# Altium PCB 数字时钟v3.PcbDoc
Units mil, origin at the board's own origin, x right, y up, seen from the top; angles counter-clockwise.
Board outline 3937.01 x 3785 mil, 2 copper layers (Top Layer, Bottom Layer); 76 components, 124 nets, 412 pads, 35 vias.
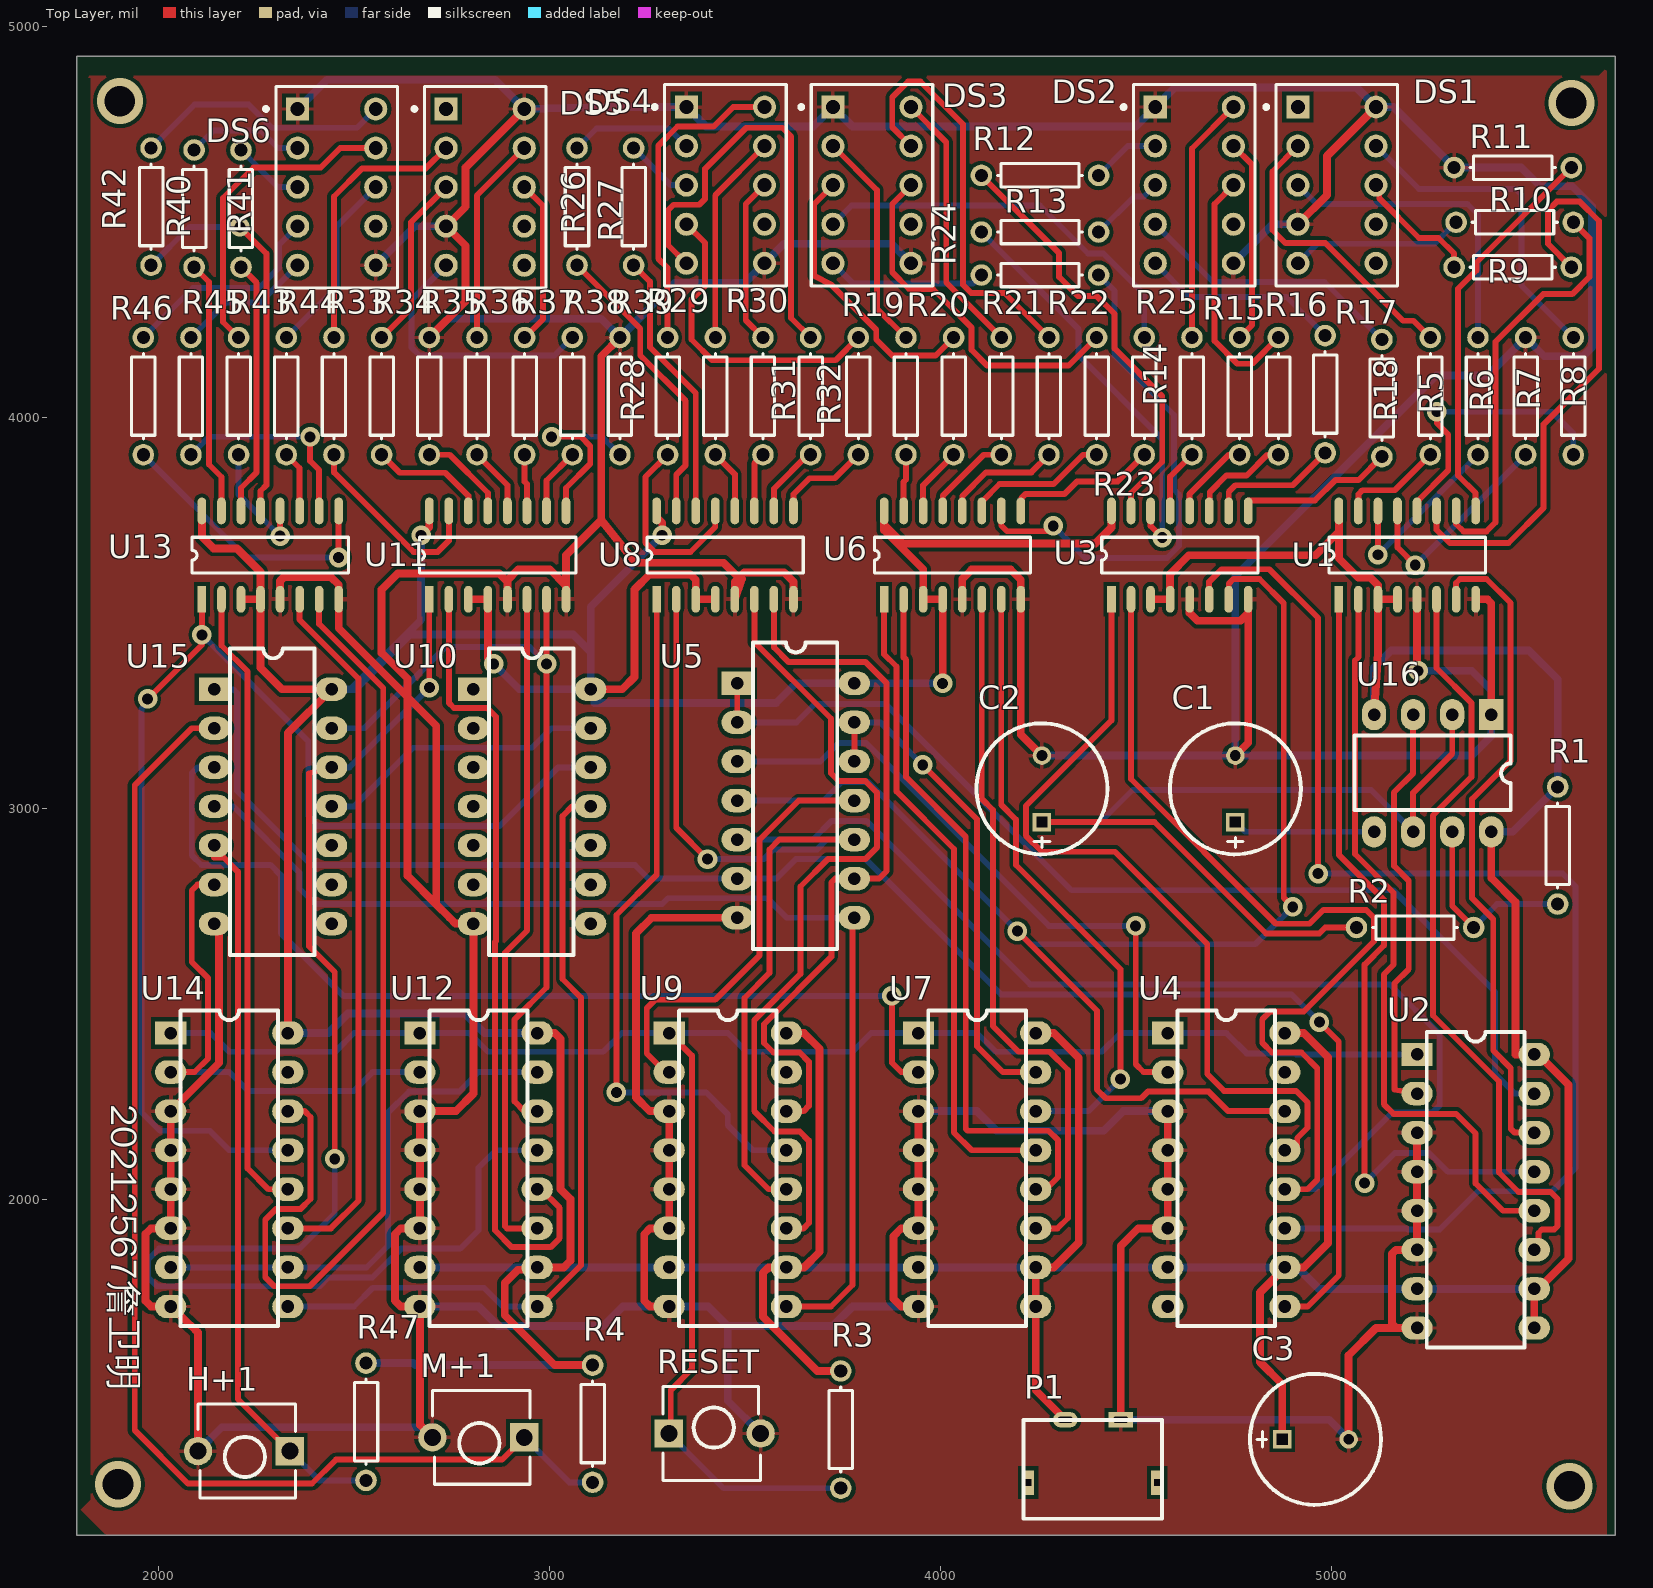
[diagram p0: Top Layer view]
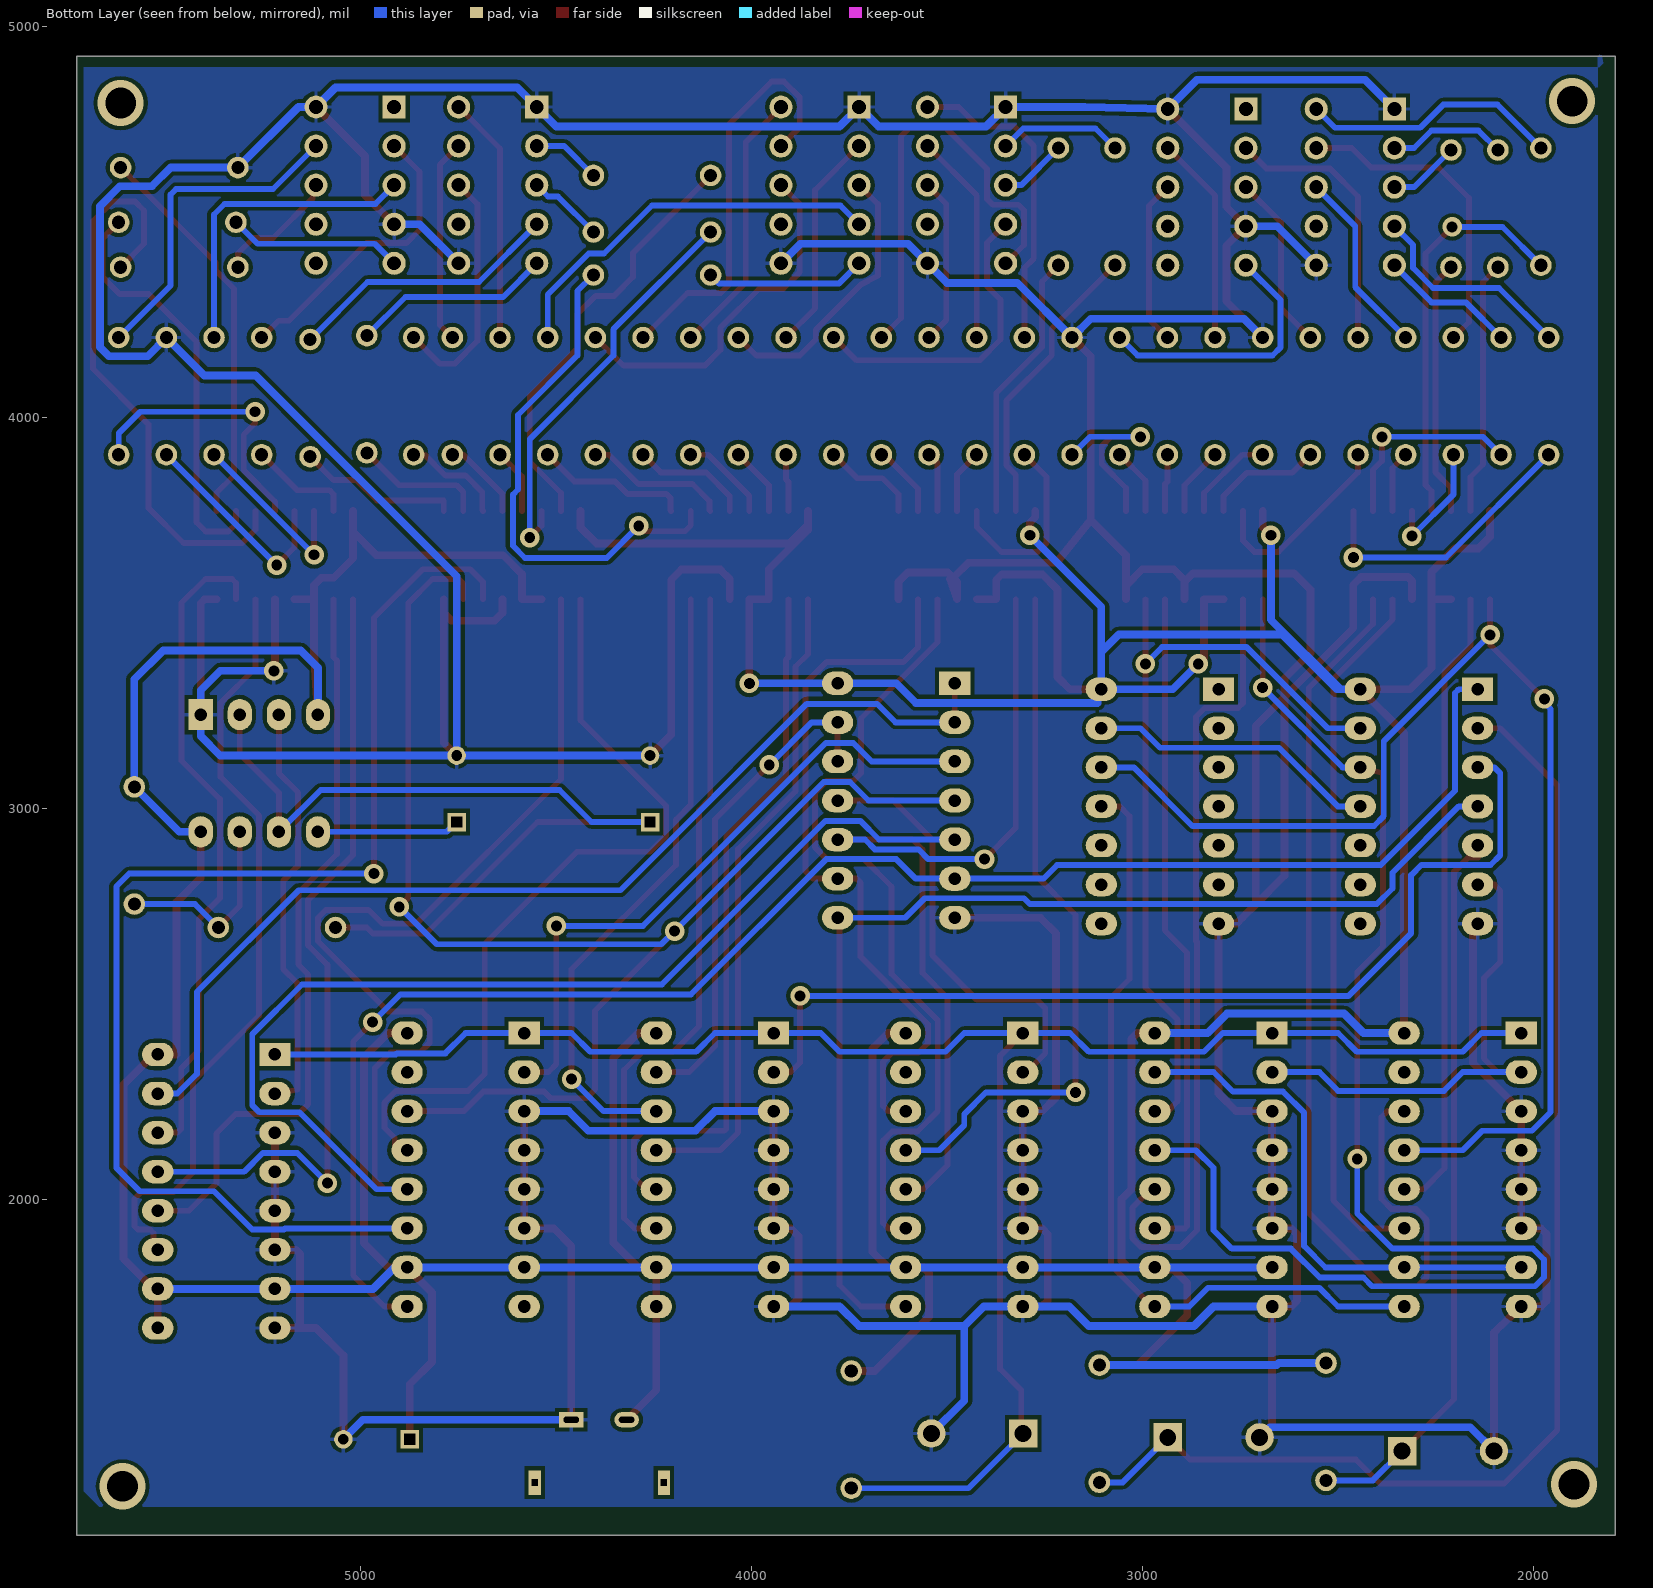
[diagram p1: Bottom Layer view, seen from below]

## Layer stack, top to bottom
Top Solder: solder mask 0.4, Solder Resist, Dk 3.5
Top Layer: signal copper 1.4
Dielectric 1: dielectric 12.6, FR-4, Dk 4.8
Bottom Layer: signal copper 1.4
Bottom Solder: solder mask 0.4, Solder Resist, Dk 3.5

## Board outline
1790,1140 1790,4925 5727.01,4925 5727.01,1140

## Design rules (kind name [scope] priority, off if disabled: settings)
Clearance [All] p1: gap=10 ignorepadtopadclearanceinfootprint=FALSE
PolygonConnect [All] p1: connectstyle=Relief reliefconductorwidth=10 reliefentries=4 polygonreliefangle="90 Angle" airgapwidth=10
RoutingVias [All] p1: holewidth=28 width=50 viastyle="Through Hole" minholewidth=28 minwidth=50 maxholewidth=28 maxwidth=50
SolderMaskExpansion [All] p1: expansion=4 istentingtop=FALSE
Width GND [InNet('GND')] p1: maxlimit=25 minlimit=10 preferedwidth=20
Width VCC [InNet('VCC')] p2: maxlimit=25 minlimit=10 preferedwidth=20
Width [All] p3: maxlimit=20 minlimit=10 preferedwidth=15
30 further rules are at their usual default settings.

## Components (designator, comment, footprint, x,y, rotation, side; value= is the part's Value field where it differs from the comment)
C1 "Cap Pol1" 电容 4755,2965 r270 top value=10uF
C2 "Cap Pol1" 电容 4260,2965 r270 top value=10uF
C3 "Cap Pol1" 电容 4875,1385 r180 top value=10uF
DS1 "Dpy Amber-CC" A 5015,4595 r0 top
DS2 "Dpy Amber-CC" A 4650,4595 r0 top
DS3 "Dpy Amber-CC" A 3825,4595 r0 top
DS4 "Dpy Amber-CC" A 3450,4595 r0 top
DS5 "Dpy Amber-CC" A 2835,4590 r0 top
DS6 "Dpy Amber-CC" A 2455,4590 r0 top
H+1 "SW-PB" 按键 2335,1355 r180 top
M+1 "SW-PB" 按键 2935,1390 r180 top
P1 "type-c-2p" type-c-2p 4461.73,1435 r180 top
R1 "Res3" AXIAL-0.3 5580,2905 r90 top value=47K
R2 "Res3" AXIAL-0.3 5215,2695 r0 top value=47K
R3 "Res3" AXIAL-0.3 3745,1410 r270 top value=220
R4 "Res3" AXIAL-0.3 3110,1425 r270 top value=220
R5 "Res1" AXIAL-0.3 5254,4055 r90 top value=1K
R6 "Res1" AXIAL-0.3 5376,4055 r90 top value=1K
R7 "Res1" AXIAL-0.3 5498,4055 r90 top value=1K
R8 "Res1" AXIAL-0.3 5620,4055 r90 top value=1K
R9 "Res1" AXIAL-0.3 5465,4385 r180 top value=1K
R10 "Res1" AXIAL-0.3 5470,4500 r180 top value=1K
R11 "Res1" AXIAL-0.3 5465,4640 r180 top value=1K
R12 "Res1" AXIAL-0.3 4255,4620 r0 top value=1K
R13 "Res1" AXIAL-0.3 4255,4475 r0 top value=1K
R14 "Res1" AXIAL-0.3 4644,4055 r90 top value=1K
R15 "Res1" AXIAL-0.3 4766,4055 r90 top value=1K
R16 "Res1" AXIAL-0.3 4865,4055 r90 top value=1K
R17 "Res1" AXIAL-0.3 4985,4060 r90 top value=1K
R18 "Res1" AXIAL-0.3 5130,4050 r90 top value=1K
R19 "Res1" AXIAL-0.3 3912,4055 r90 top value=1K
R20 "Res1" AXIAL-0.3 4034,4055 r90 top value=1K
R21 "Res1" AXIAL-0.3 4156,4055 r90 top value=1K
R22 "Res1" AXIAL-0.3 4278,4055 r90 top value=1K
R23 "Res1" AXIAL-0.3 4400,4055 r90 top value=1K
R24 "Res1" AXIAL-0.3 4255,4365 r180 top value=1K
R25 "Res1" AXIAL-0.3 4522,4055 r90 top value=1K
R26 "Res1" AXIAL-0.3 3070,4540 r90 top value=1K
R27 "Res1" AXIAL-0.3 3215,4540 r90 top value=1K
R28 "Res1" AXIAL-0.3 3302,4055 r90 top value=1K
R29 "Res1" AXIAL-0.3 3424,4055 r90 top value=1K
R30 "Res1" AXIAL-0.3 3546,4055 r90 top value=1K
R31 "Res1" AXIAL-0.3 3668,4055 r90 top value=1K
R32 "Res1" AXIAL-0.3 3790,4055 r90 top value=1K
R33 "Res1" AXIAL-0.3 2448,4055 r90 top value=1K
R34 "Res1" AXIAL-0.3 2570,4055 r90 top value=1K
R35 "Res1" AXIAL-0.3 2692,4055 r90 top value=1K
R36 "Res1" AXIAL-0.3 2814,4055 r90 top value=1K
R37 "Res1" AXIAL-0.3 2936,4055 r90 top value=1K
R38 "Res1" AXIAL-0.3 3058,4055 r90 top value=1K
R39 "Res1" AXIAL-0.3 3180,4055 r90 top value=1K
R40 "Res1" AXIAL-0.3 2090,4535 r90 top value=1K
R41 "Res1" AXIAL-0.3 2210,4535 r90 top value=1K
R42 "Res1" AXIAL-0.3 1980,4540 r90 top value=1K
R43 "Res1" AXIAL-0.3 2204,4055 r90 top value=1K
R44 "Res1" AXIAL-0.3 2326,4055 r90 top value=1K
R45 "Res1" AXIAL-0.3 2082,4055 r90 top value=1K
R46 "Res1" AXIAL-0.3 1960,4055 r90 top value=1K
R47 "Res3" AXIAL-0.3 2530,1430 r270 top value=220
RESET "SW-PB" 按键 3305,1400 r0 top
U1 "CD4511" CD4511BM/TR 5020,3535 r90 top
U2 "74LS160" DIP-16 5170,2370 r0 top
U3 "CD4511" CD4511BM/TR 4438,3535 r90 top
U4 "74LS160" DIP-16 4532,2425 r0 top
U5 "74LS00" DIP-14 3430,3320 r0 top
U6 "CD4511" CD4511BM/TR 3856,3535 r90 top
U7 "74LS160" DIP-16 3894,2425 r0 top
U8 "CD4511" CD4511BM/TR 3274,3535 r90 top
U9 "74LS160" DIP-16 3256,2425 r0 top
U10 "74LS00" DIP-14 2754.95,3305 r0 top
U11 "CD4511" CD4511BM/TR 2692,3535 r90 top
U12 "74LS160" DIP-16 2618,2425 r0 top
U13 "CD4511" CD4511BM/TR 2110,3535 r90 top
U14 "74LS160" DIP-16 1980,2425 r0 top
U15 "74LS08" DIP-14 2091.97,3305 r0 top
U16 "NE555" DIP-8 5410,3290 r270 top

## Footprints (in the part's own frame and the unit in brackets; to place one, negate y for a bottom-side part, rotate by r counter-clockwise, add the part's x,y. Pads: shape width x height; smd on the part's side, far side on the other; paste and mask are expansions set on the pad)
A [mm] "LED, 7-Segment Display, 7.62 mm, RHD; 10 Leads; Row Space 5.08 mm; Pitch 2.54 mm"
  rect 1.5x1.5 hole 0.9: 1(-2.54,5.08)
  round 1.5 hole 0.9: 2(-2.54,2.54) 3(-2.54,0) 4(-2.54,-2.54) 5(-2.54,-5.08) 6(2.54,-5.08) 7(2.54,-2.54) 8(2.54,0) 9(2.54,2.54) 10(2.54,5.08)
  silkscreen extent -4.72,-6.55 3.95,6.55, body extent -3.95,-6.55 3.95,6.55, height 6.34
AXIAL-0.3 [mm] "Axial Device, Thru-Hole; 2 Leads; 0.3 in Pin Spacing"
  round 1.4 hole 0.85: 1(-3.81,0) 2(3.81,0)
  silkscreen extent -2.77,-0.76 2.77,0.76
CD4511BM/TR [mm]
  rect 1.745x0.56 smd: 1(0,0)
  oval 1.745x0.56 smd: 2(0,-1.27) 3(0,-2.54) 4(0,-3.81) 5(0,-5.08) 6(0,-6.35) 7(0,-7.62) 8(0,-8.89) 9(5.745,-8.89) 10(5.745,-7.62) 11(5.745,-6.35) 12(5.745,-5.08) 13(5.745,-3.81) 14(5.745,-2.54) 15(5.745,-1.27) 16(5.745,0)
  silkscreen extent 1.71,-9.53 4.04,0.64
DIP-8 [mil]
  rect 80x62 / inner rect 100x50 / far side rect 80x62 hole 32: 1(50,0)
  oval 80x62 / inner oval 100x50 / far side oval 80x62 hole 32: 2(50,-100) 3(50,-200) 4(50,-300) 5(350,-300) 6(350,-200) 7(350,-100) 8(350,0)
  silkscreen extent 104,-350 294,50, body extent 37,-334 360,31, height 148
DIP-14 [mil]
  rect 80x60 hole 32: 1(50,0)
  oval 80x60 hole 32: 2(50,-100) 3(50,-200) 7(50,-600) 8(350,-600) 9(350,-500) 10(350,-400) 11(350,-300) 12(350,-200) 13(350,-100) 14(350,0)
  oval 80x60 / inner oval 100x50 / far side oval 80x62 hole 32: 4(50,-300) 5(50,-400) 6(50,-500)
  silkscreen extent 90,-680 306,104, body extent 50,-676 360,92, height 200
DIP-16 [mil] "淘宝ID:黄晶宝石   店铺网址:https://shop463601444.taobao.com"
  rect 80x60 / inner rect 100x50 / far side rect 80x60 hole 32: 1(50,0)
  oval 80x60 / inner oval 100x50 / far side oval 80x60 hole 32: 2(50,-100) 3(50,-200) 4(50,-300) 5(50,-400) 6(50,-500) 7(50,-600) 8(50,-700) 9(350,-700) 10(350,-600) 11(350,-500) 12(350,-400) 13(350,-300) 14(350,-200) 15(350,-100) 16(350,0)
  silkscreen extent 75,-750 325,58, body extent 42,-744 352,44, height 200
type-c-2p [mm]
  rect 0.8x1.6 hole 0.4 square: 3(-2.375,4.08) 4(6.025,4.08)
  oval 1.6x1 hole 0.4 slot 1 at 0 deg: A9(3.6,0)
  rect 1.6x1 hole 0.4 slot 1 at 0 deg unplated: B12(0,0)
  silkscreen extent -2.68,0 6.33,6.43
按键 [mm] "Switch; 2 Leads"
  rect 1.85x1.85 hole 1.1: 1(0,0)
  round 1.85 hole 1.1: 2(5.969,0)
  silkscreen extent -0.38,-3.05 5.97,3.05
电容 [mm]
  rect 1.2x1.2 hole 0.7 square: 1(0,0)
  round 1.2 hole 0.7: 2(-4.318,0)
  silkscreen extent -6.42,-4.26 2.1,4.26

## Part data
C1 C2 C3: "Polarized Capacitor (Radial)", LatestRevisionDate=17-Jul-2002, LatestRevisionNote="Re-released for DXP Platform.", PackageDescription="Polarized Capacitor (Radial); 2 Leads", PackageReference=RB7.6-15, Published=8-Jun-2000, Publisher="Altium Limited"
DS1 DS2 DS3 DS4 DS5 DS6: "7.62 mm Black Surface Orange 7-Segment Display: CC, RH DP", Colour=Orange, ComponentLink1Description="Manufacturer Link", ComponentLink1URL=http://www.agilent.com/, DatasheetVersion=19-Feb-2002, LatestRevisionDate=17-Dec-2003, LatestRevisionNote="Schematic revised, PCB Footprint replaced.", MinimumIntensity="354 ucd", Note="Pins 1 and 6 are redundant Cathodes.", PackageDescription="LED, 7-Segment Display, 7.62 mm, RHD; 10 Leads; Row Space 5.08 mm; Pitch 2.54 mm", PackageReference=A, PackageVersion=11-Feb-2002, Published=8-Jun-2000, Publisher="Altium Limited"
H+1 M+1 RESET: "Switch", LatestRevisionDate=17-Jul-2002, LatestRevisionNote="Re-released for DXP Platform.", PackageDescription="Switch; 2 Leads", PackageReference=SPST-2, Published=24-Mar-1999, Publisher="Altium Limited"
R1 R2 R3 R4 R5 R6 R7 R8 R9 R10 R11 R12 R13 R14 R15 R16 R17 R18 R19 R20 R21 R22 R23 R24 R25 R26 R27 R28 R29 R30 R31 R32 R33 R34 R35 R36 R37 R38 R39 R40 R41 R42 R43 R44 R45 R46 R47: "Resistor", Published=8-Jun-2000, Publisher="Altium Limited"
  R1 R2 R3 R4 R47: LatestRevisionDate=29-May-2009, LatestRevisionNote="IPC-7351 Footprint Added.", PackageDescription="Chip Resistor", PackageReference=J1-0603
  R5 R6 R7 R8 R9 R10 R11 R12 R13 R14 R15 R16 R17 R18 R19 R20 R21 R22 R23 R24 R25 R26 R27 R28 R29 R30 R31 R32 R33 R34 R35 R36 R37 R38 R39 R40 R41 R42 R43 R44 R45 R46: LatestRevisionDate=17-Jul-2002, LatestRevisionNote="Re-released for DXP Platform.", PackageDescription="Axial Device, Thru-Hole; 2 Leads; 0.3 in Pin Spacing", PackageReference=AXIAL-0.3

## Via types
v1: diameter 50, hole 28, Top Layer to Bottom Layer, 31 vias
v2: diameter 118.11, hole 78.74, Top Layer to Bottom Layer, 4 vias

## Nets (pads, with @x,y where several pads share a name; then routed paths per layer and width w, separated by ;. In a path a pad name is that pad's centre, name@x,y a point inside that pad or via, vN(x,y) a via of type N, cw(c..) or ccw(c..) an arc to the next point about the centre after c; other vN are vias at no path point)
CLK: U2.2 U16.3 | length 1069.9
  Top Layer w15: U16.3 5210,3090 5161,3041 5161,2852.73 5198.67,2815.06 5198.67,2588.55 5162,2551.88 5162,2280 U2.2
CLR: R3.2 RESET.1 U2.1 U4.1 U7.1 U9.1 U12.1 U14.1 | length 4946.2
  Top Layer w15: RESET.1 3310,1400 3310,1511 3364,1565 3364,2367 U9.1
  Bottom Layer w15: U14.1 2132,2425 2180,2377 2451,2377 2499,2425 U12.1 2794,2425 2842,2377 3137,2377 3185,2425 U9.1 3456,2425 3504,2377 3775,2377 3823,2425 U7.1 4094,2425 4142,2377 4413,2377 4461,2425 U4.1 4732,2425 4784,2373 4908,2373 4911,2370 U2.1 ; RESET.1 3445,1260 R3.2
GND: C1.2 C2.2 C3.2 DS1.4 DS1.10 DS2.1 DS2.6 DS3.1 DS3.6 DS4.1 DS4.6 DS5.4 DS5.10 DS6.1 DS6.6 H+1.2 M+1.2 P1.B12 R7.2 R11.2 R35.2 R39.2 RESET.2 U1.5 U1.8 U2.3 U2.4 U2.5 U2.6 U2.8 U3.5 U3.8 U4.3 U4.4 U4.5 U4.6 U5.7 U6.5 U6.8 U7.3 U7.4 U7.5 U7.6 U7.8 U8.5 U8.8 U9.3 U9.4 U9.5 U9.6 U9.8 U10.7 U11.5 U11.8 U12.3 U12.4 U12.5 U12.6 U12.8 U13.5 U13.8 U14.3 U14.4 U14.5 U14.6 U14.8 U15.7 U16.1 | length 26585.3
  Top Layer w20: H+1.2 2100,1658.36 2093.95,1664.41 U14.8 1980,1725 1966,1739 1966,1911 1980,1925 U14.6 U14.5 U14.4 U14.3 2154,2349 2154,2705 U15.7 ; U13.5 2310,3582 2320,3592 2440,3592 2460,3572 U13.8 2460,3461 2636.42,3284.58 ; R35.2 2785,4298 2785,4440 DS5.4 2785,4540 2785,4640 DS5.10 ; M+1.2 2668,1422 U12.8 2619,1725 2604,1740 2604,1910 2619,1925 U12.6 U12.5 U12.4 U12.3 2760,2225 2804.95,2269.95 U10.7 2760,2705 ; 2759,2705 2744,2720 2710,2754 ; U11.5 2892,3580 ; U11.8 3042,3570 ; R39.2 3132,4157 3132,3738 ; U9.8 3257,1725 3242,1740 3242,1910 3257,1925 U9.6 U9.5 U9.4 U9.3 3256,2225 3221,2260 3221,2680 3261,2720 U5.7 ; 3492.14,3587.17 U8.5 3474,3580 3484,3590 ; U8.8 3624,3580 3600,3604 3498,3604 3484,3590 ; U7.8 3900,1725 3880,1745 3880,1905 3900,1925 U7.6 U7.5 U7.4 U7.3 ; U6.5 4056,3587 4080,3611 4180,3611 4206,3585 U6.8 4206,3189 C2.2 ; P1.B12 4461.73,1880 4506.73,1925 U4.6 U4.5 U4.4 U4.3 ; U3.5 4638,3500 4658,3480 4768,3480 4788,3500 ; C1.2 4788,3168 4788,3500 ; U3.8 4788,3500 ; DS1.4 4989.53,4569.53 4989.53,4669.53 DS1.10 ; C3.2 5045,1600 5115,1670 5166,1670 ; U2.8 5166,1670 ; U2.3 U2.5 U2.6 5166,1870 5156,1860 5156,1680 5166,1670 ; U1.5 5220,3355 v1(5223,3352) ; U1.8 5400,3535 5410,3525 U16.1 ; 2636.42,3284.58 2710,3211 2710,2754 ; 2636.42,3284.58 2636.42,3331.58 2570,3398 2570,3560 2611,3601 2871,3601 2892,3580 ; 2636.42,3284.58 2636.42,2827.58 2710,2754 ; 2892,3580 2892,3584 2920,3612 3000,3612 3042,3570 ; 3042,3570 3042,3648 3132,3738 ; 3132,3738 3219.17,3628.83 3445.17,3628.83 3484,3590
  Bottom Layer w20: H+1.2 2161,1416 2674,1416 M+1.2 ; DS6.1 2430,4865 2860,4865 DS5.10 3148,4795 DS4.1 3400,4745 3675,4745 DS3.1 3775,4745 4500,4745 DS2.1 4600,4845 5065,4845 DS1.10 5160,4795 R11.2 5487,4640 5535,4592 5617,4592 5668,4541 5668,4180 5645,4157 5546,4157 R7.2 5401,4108 5269,4108 4755,3594 C1.2 ; DS6.6 2655,4490 DS5.4 ; U12.8 2818,1725 2868,1675 3137,1675 3187,1725 U9.8 3406,1725 3456,1675 ; R35.2 2740,4253 3132,4253 R39.2 3320,4345 3500,4345 DS4.6 3600,4445 3875,4445 DS3.6 ; RESET.2 3456,1484 3456,1675 ; U7.8 3775,1725 3725,1675 3456,1675 ; U7.3 4094,2225 4144,2175 4418,2175 4468,2225 U4.3 ; C2.2 C1.2 ; P1.B12 4995,1435 C3.2 ; DS2.6 4850,4495 DS1.4 ; v1(5223,3352) 5360,3352 5410,3302 U16.1 5410,3185 5360,3135 C1.2
H_CLK: U12.2 U14.2 U15.6 | length 1299.8
  Top Layer w15: U14.2 2091,2325 2126,2360 2126,2565 2084,2607 2084,2790 2099,2805 U15.6
  Bottom Layer w15: U14.2 2180,2325 2228,2277 2499,2277 2547,2325 U12.2
H_CLK1: U5.8 U9.9 U15.4 | length 2928.7
  Top Layer w15: U9.9 3720,1725 3775,1780 3775,2720 U5.8
  Bottom Layer w15: U15.4 2190,3005 2360,2835 2360,2795 2400,2755 3288,2755 3303,2770 3557,2770 3607,2720 U5.8
M_CLK: U7.2 U15.3 | length 2551.5
  Top Layer w15: v1(3876,2520) 3876,2349 3900,2325 U7.2
  Bottom Layer w15: U15.3 2099,3105 2084,3090 2084,2880 2109,2855 2286,2855 2312,2829 2312,2680 2472,2520 v1(3876,2520)
M_CLK1: U4.9 U5.6 U15.1 | length 4208.2
  Top Layer w15: U4.9 4940,1725 5019.5,1804.5 5019.5,2403.5 v1(4970,2453)
  Bottom Layer w15: U15.1 2190,3305 2200,3295 2200,3045 2390,2855 3218,2855 3253,2820 U5.6 3580,2820 3630,2870 3809,2870 4155,2524 4899,2524 v1(4970,2453)
NetC1_1: C1.1 U16.5 | length 365.4
  Bottom Layer w15: C1.1 4780,2940 U16.5
NetC2_1: C2.1 R2.1 U16.2 U16.6 | length 2299.4
  Top Layer w15: C2.1 4548.16,2965 4833.63,2679.53 4969.73,2679.53 4985.2,2695 R2.1 ; U16.6 5210,3040 5310,3140 U16.2
  Bottom Layer w15: C2.1 4410,2965 4492,3047 5103,3047 U16.6
NetDS1_2: DS1.2 R5.2 | length 759.8
  Top Layer w15: DS1.2 4850,4630 4850,4480 4883,4447 4985,4447 5184,4248 5211,4248 R5.2
NetDS1_3: DS1.3 R6.2 | length 807.1
  Bottom Layer w15: DS1.3 4963,4547 5349,4547 5376,4520 R6.2
NetDS1_5: DS1.5 R10.2 | length 448.5
  Bottom Layer w15: DS1.5 4965,4445 5265,4445 R10.2
NetDS1_8: DS1.8 R9.2 | length 322.1
  Top Layer w15: DS1.8 5123.43,4586.57 5123.43,4561.57 5225,4460 5275,4460 5315,4420 R9.2
NetDS1_9: DS1.9 R8.2 | length 844.5
  Bottom Layer w15: DS1.9 5225,4585 5473,4585 5487,4571 5487,4338 R8.2
NetDS2_2: DS2.2 R12.2 | length 176.1
  Bottom Layer w15: R12.2 4480,4695 DS2.2
NetDS2_3: DS2.3 R13.2 | length 194.7
  Bottom Layer w15: R13.2 4496,4566 4521,4566 DS2.3
NetDS2_4: DS2.4 R18.2 | length 702.2
  Bottom Layer w15: DS2.4 4698,4347 4983,4347 R18.2
NetDS2_5: DS2.5 R17.2 | length 511.6
  Bottom Layer w15: DS2.5 4636,4309 4886,4309 R17.2
NetDS2_8: DS2.8 R16.2 | length 633.7
  Top Layer w15: DS2.8 4702,4547 4702,4196 4760,4138 4798,4138 R16.2
NetDS2_9: DS2.9 R15.2 | length 523.1
  Top Layer w15: DS2.9 4798,4647 4798,4237 R15.2
NetDS2_10: DS2.10 R14.2 | length 633.9
  Top Layer w15: R14.2 4644,4689 DS2.10
NetDS3_2: DS3.2 R19.2 | length 567.5
  Top Layer w15: DS3.2 3837.57,4582.43 3837.57,4279.43 R19.2
NetDS3_3: DS3.3 R20.2 | length 723.2
  Top Layer w15: DS3.3 3677,4547 3677,4363.09 3720.91,4340.09 3836,4225 3836,4200 3877,4159 3988,4159 R20.2
NetDS3_4: DS3.4 R25.2 | length 1021.3
  Bottom Layer w15: DS3.4 3773,4543 4255,4543 4378,4420 4417,4420 4522,4315 R25.2
NetDS3_5: DS3.5 R24.2 | length 410.7
  Bottom Layer w15: DS3.5 3777,4343 4083,4343 R24.2
NetDS3_8: DS3.8 R23.2 | length 928.1
  Top Layer w15: DS3.8 3877,4547 3877,4372 3920,4329 3981,4329 4080,4230 4080,4173 4120,4133 4328,4133 R23.2
NetDS3_9: DS3.9 R22.2 | length 1074.5
  Top Layer w15: DS3.9 3877,4743 3877,4820 3917,4860 3949,4860 4058,4751 4058,4340 4079,4319 4164,4319 R22.2
NetDS3_10: DS3.10 R21.2 | length 685.7
  Top Layer w15: DS3.10 4015,4705 4015,4346 R21.2
NetDS4_2: DS4.2 R26.2 | length 319.4
  Bottom Layer w15: R26.2 3120,4740 3305,4740 DS4.2
NetDS4_3: DS4.3 R27.2 | length 174.4
  Bottom Layer w15: R27.2 3310,4595 DS4.3
NetDS4_4: DS4.4 R32.2 | length 802.4
  Top Layer w15: DS4.4 3398,4447 3398,4337 3363,4302 3363,4200 3416,4147 3732,4147 R32.2
NetDS4_5: DS4.5 R31.2 | length 1147.9
  Top Layer w15: DS4.5 3302.97,4442.03 3302.97,4530.97 3317,4545 3383,4545 3398,4560 3398,4637.03 3503,4742.03 3595.97,4742.03 3618,4720 3618,4255 R31.2
NetDS4_8: DS4.8 R30.2 | length 428.1
  Top Layer w15: R30.2 3502,4249 3502,4547 DS4.8
NetDS4_9: DS4.9 R29.2 | length 542.2
  Top Layer w15: R29.2 3424,4569 DS4.9
NetDS4_10: DS4.10 R28.2 | length 814
  Top Layer w15: R28.2 3302,4382.97 3277.97,4407 3277.97,4695.97 3327,4745 3419.79,4745 3469.79,4795 DS4.10
NetDS5_2: DS5.2 R33.2 | length 699.4
  Top Layer w15: R33.2 2448,4566 2520,4638 2683,4638 DS5.2
NetDS5_3: DS5.3 R34.2 | length 453.3
  Top Layer w15: R34.2 2645,4280 2645,4500 DS5.3
NetDS5_5: DS5.5 R38.2 | length 686.6
  Bottom Layer w15: DS5.5 2646,4301 2646,4180 2667,4159 3012,4159 R38.2
NetDS5_8: DS5.8 R37.2 | length 424.4
  Top Layer w15: DS5.8 2983,4542 2983,4252 R37.2
NetDS5_9: DS5.9 R36.2 | length 535.1
  Top Layer w15: R36.2 2814,4569 DS5.9
NetDS6_2: DS6.2 R40.2 | length 304.4
  Bottom Layer w15: R40.2 2140,4735 2260,4735 2305,4690 DS6.2
NetDS6_3: DS6.3 R41.2 | length 184.4
  Bottom Layer w15: R41.2 2305,4590 DS6.3
NetDS6_4: DS6.4 R46.2 | length 547.6
  Bottom Layer w15: R46.2 2087,4332 2256,4332 2307,4383 2307,4442 DS6.4
NetDS6_5: DS6.5 R45.2 | length 349.6
  Bottom Layer w15: R45.2 2172,4295 2260,4295 DS6.5
NetDS6_8: DS6.8 R44.2 | length 479.9
  Bottom Layer w15: R44.2 2455,4334 2455,4490 DS6.8
NetDS6_9: DS6.9 R43.2 | length 817.6
  Top Layer w15: R43.2 2164,4245 2164,4562 2242,4640 2414,4640 2464,4690 DS6.9
NetDS6_10: DS6.10 R42.2 | length 665.3
  Bottom Layer w15: R42.2 2091,4801 2230,4801 2289,4742 2507,4742 DS6.10
NetH+1_1: H+1.1 R47.2 U15.5 | length 1872
  Top Layer w15: U15.5 2141,2905 2141,2874 2166,2874 2202,2838 2202,1488 H+1.1
  Bottom Layer w15: H+1.1 2410,1280 R47.2
NetM+1_1: M+1.1 R4.2 U15.2 | length 3240.3
  Top Layer w15: U15.2 2084,3205 1938,3059 1938,1408 2074,1272 2392,1272 2453,1333 2878,1333 M+1.1
  Bottom Layer w15: M+1.1 3050,1275 R4.2
NetR1_1: R1.1 R2.2 U16.7 | length 507.6
  Top Layer w15: U16.7 5310,2750 R2.2
  Bottom Layer w15: R2.2 5425,2755 R1.1
NetR5_1: R5.1 U1.15 | length 268.7
  Top Layer w15: U1.15 5070,3804 5080,3814 5163,3814 R5.1
NetR6_1: R6.1 U1.14 | length 474.2
  Top Layer w15: v1(5120,3649) U1.14
  Bottom Layer w15: v1(5120,3649) R6.1
NetR7_1: R7.1 U1.13 | length 557
  Top Layer w15: U1.13 5170,3668 v1(5215.5,3622.5)
  Bottom Layer w15: v1(5215.5,3622.5) R7.1
NetR8_1: R8.1 U1.12 | length 725.7
  Top Layer w15: U1.12 5220,3785 5300,3865 5300,3957 5271,3986 v1(5271,4015)
  Bottom Layer w15: v1(5271,4015) 5565,4015 5620,3960 R8.1
NetR9_1: R9.1 U1.11 | length 1497.5
  Top Layer w15: U1.11 5270,3713 5304,3679 5454,3679 5544,3769 5544,3983 5686,4125 5686,4503.31 5636.52,4552.79 5577.79,4552.79 5555,4530 5555,4445 R9.1
NetR10_1: R10.1 U1.10 | length 1079.4
  Top Layer w15: U1.10 5320,3728 5339,3709 5398.06,3709 5421.06,3732 5421.06,4194.06 5543,4316 5617,4316 5661,4360 5661,4459 R10.1
NetR11_1: R11.1 U1.9 | length 1017.6
  Top Layer w15: U1.9 5370,3807 5325,3852 5325,4330 5372,4377 5372,4397 R11.1
NetR12_1: R12.1 U3.15 | length 1111.3
  Top Layer w15: R12.1 4304,4421 4304,4360 4353,4311 4400,4311 4446,4265 4446,4177 4568,4055 4568,3888 4567.06,3887.06 4567.06,3886.34 4488,3807.28 U3.15
NetR13_1: R13.1 U3.14 | length 1054.4
  Top Layer w15: U3.14 4538,3723 v1(4568,3693)
  Bottom Layer w15: R13.1 4354,4226 4354,4159 4568,3945 v1(4568,3693)
NetR14_1: R14.1 U3.13 | length 167
  Top Layer w15: U3.13 4588,3849 R14.1
NetR15_1: R15.1 U3.12 | length 213.2
  Top Layer w15: U3.12 4638,3805 4738,3905 R15.1
NetR16_1: R16.1 U3.11 | length 264
  Top Layer w15: U3.11 4689.35,3762.53 4689.35,3809.35 4732,3852 4784,3852 4837,3905 R16.1
NetR17_1: R17.1 U3.10 | length 337.2
  Top Layer w15: U3.10 4738,3810 4755,3827 4902,3827 R17.1
NetR18_1: R18.1 U3.9 | length 415.3
  Top Layer w15: U3.9 4788,3788.2 4959.13,3788.2 5010.93,3840 5070,3840 R18.1
NetR19_1: R19.1 U6.15 | length 146.3
  Top Layer w15: U6.15 3906,3835.65 3912,3841.65 R19.1
NetR20_1: R20.1 U6.14 | length 176.1
  Top Layer w15: U6.14 3956,3827 R20.1
NetR21_1: R21.1 U6.13 | length 232.3
  Top Layer w15: U6.13 4006,3800 4111,3905 R21.1
NetR22_1: R22.1 U6.12 | length 303.7
  Top Layer w15: U6.12 4056,3799 4116.94,3859.94 4232.94,3859.94 R22.1
NetR23_1: R23.1 U6.11 | length 367.2
  Top Layer w15: U6.11 4108.3,3763.48 4108.3,3786.81 4151.49,3830 4290,3830 4365,3905 R23.1
NetR24_1: R24.1 U6.10 | length 1329.1
  Top Layer w15: U6.10 4156,3724 4170.67,3709.33 4275.33,3709.33 v1(4289,3723)
  Bottom Layer w15: v1(4289,3723) 4371,3641 4580,3641 4611,3672 4611,3803 4598,3816 4598,4007 4446,4159 4446,4324 R24.1
NetR25_1: R25.1 U6.9 | length 394
  Top Layer w15: U6.9 4207.35,3762.53 4207.35,3794.04 4218.31,3805 4318.12,3805 4350.12,3837 4454,3837 R25.1
NetR26_1: R26.1 U8.15 | length 753.9
  Top Layer w15: R26.1 3231.94,4228.06 3231.94,4159.06 3348,4043 3348,3878 3324,3854 U8.15
NetR27_1: R27.1 U8.14 | length 694.7
  Top Layer w15: R27.1 3256.94,4348.06 3256.94,4180 3374,4062.94 U8.14
NetR28_1: R28.1 U8.13 | length 505
  Top Layer w15: R28.1 3245,3848 3245,3680 3268.67,3656.33 3360.33,3656.33 3424,3720 U8.13
NetR29_1: R29.1 U8.12 | length 164.5
  Top Layer w15: R29.1 3474,3855 U8.12
NetR30_1: R30.1 U8.11 | length 152.9
  Top Layer w15: U8.11 3524,3883 R30.1
NetR31_1: R31.1 U8.10 | length 186.9
  Top Layer w15: U8.10 3574,3818.03 3660.97,3905 R31.1
NetR32_1: R32.1 U8.9 | length 250.7
  Top Layer w15: U8.9 3624,3804 3665,3845 3730,3845 R32.1
NetR33_1: R33.1 U11.15 | length 511.3
  Top Layer w15: R33.1 2448,3860 2651.5,3656.5 2713.5,3656.5 2742,3685 U11.15
NetR34_1: R34.1 U11.14 | length 304.3
  Top Layer w15: R34.1 2616,3859 2733,3859 2792,3800 U11.14
NetR35_1: R35.1 U11.13 | length 236.4
  Top Layer w15: R35.1 2744,3905 2842,3807 U11.13
NetR36_1: R36.1 U11.12 | length 176.1
  Top Layer w15: R36.1 2892,3827 U11.12
NetR37_1: R37.1 U11.11 | length 146.3
  Top Layer w15: R37.1 2936,3836 2942,3830 U11.11
NetR38_1: R38.1 U11.10 | length 171.2
  Top Layer w15: U11.10 2992,3839 R38.1
NetR39_1: R39.1 U11.9 | length 494.5
  Top Layer w15: v1(3005,3951) 3080,3951 3104,3927 3104,3882 3042,3820 U11.9
  Bottom Layer w15: v1(3005,3951) 3134,3951 R39.1
NetR40_1: R40.1 U13.15 | length 652.8
  Top Layer w15: R40.1 2128,4347 2128,3880 2160,3848 U13.15
NetR41_1: R41.1 U13.14 | length 657
  Top Layer w15: U13.14 2210,3820 2250,3860 2250,4345 R41.1
NetR42_1: R42.1 U13.13 | length 1028.8
  Top Layer w15: v1(2207,4488) 2275,4420 2275,3827 2260,3812 U13.13
  Bottom Layer w15: R42.1 2078,4488 v1(2207,4488)
NetR43_1: R43.1 U13.12 | length 316.1
  Top Layer w15: v1(2310,3697) U13.12
  Bottom Layer w15: R43.1 2204,3803 v1(2310,3697)
NetR44_1: R44.1 U13.11 | length 157.9
  Top Layer w15: R44.1 2360,3871 U13.11
NetR45_1: R45.1 U13.10 | length 523.4
  Top Layer w15: v1(2387,3951) 2387,3889 2410,3866 U13.10
  Bottom Layer w15: R45.1 2128,3951 v1(2387,3951)
NetR46_1: R46.1 U13.9 | length 728.1
  Top Layer w15: v1(2460,3642) U13.9
  Bottom Layer w15: R46.1 2223,3642 v1(2460,3642)
NetU1_1: U1.1 U2.13 | length 2047.8
  Top Layer w15: U1.1 5020,2881.06 5135.06,2766 5135.06,2649.06 5086,2600 v1(5086,2041)
  Bottom Layer w15: v1(5086,2041) 5163,2118 5251,2118 5299,2070 U2.13
NetU1_2: U1.2 U2.12 | length 1920.2
  Top Layer w15: U1.2 5070,3387 5061,3378 5061,2883 5160.06,2783.94 5160.06,2599.94 5135.06,2574.94 5135.06,2242.94 5160,2218 5320,2218 5370,2168 5370,2040 5440,1970 U2.12
NetU1_6: U1.6 U2.11 | length 1965.8
  Top Layer w15: U1.6 5270,3359 5359,3270 5359,3080 5261,2982 5261,2470 5430,2301 5430,2068 5480,2018 5562,2018 5580,2000 5580,1931.29 5571.21,1922.5 5540,1922.5 5530.87,1913.37 5530.87,1880.87 U2.11
NetU1_7: U1.7 U2.14 | length 1702.2
  Top Layer w15: U1.7 5320,3577 5330,3587 5398,3587 5459,3526 5459,3122 5361,3024 5361,2770 5415,2716 5415,2380 5460,2335 5460,2180 5470,2170 U2.14
NetU2_15: U2.15 U5.1 U5.2 | length 2695.8
  Top Layer w15: U5.2 U5.1
  Bottom Layer w15: U5.2 3631.85,3220 3679.35,3267.5 3858.61,3267.5 4335.61,2790.5 5159.38,2790.5 5420,2529.88 5420,2320 5470,2270 U2.15
NetU3_1: U3.1 U4.13 | length 2058.9
  Top Layer w15: U3.1 4438,3225.12 4218.88,3006 4218.88,2930.12 4260,2889 4447,2889 4683,2653 4683,2320 4726,2277 4910,2277 4939.5,2247.5 4939.5,2182.38 4913.56,2156.44 4913.56,2125 U4.13
NetU3_2: U3.2 U4.12 U5.5 | length 5004
  Top Layer w15: U3.2 4488,3075.16 4858.63,2704.53 4944.73,2704.53 4980.26,2740.06 5090,2740.06 5110.06,2720 5110.06,2660 4930.06,2480 4844,2480 4824,2460 4824,2400 4849,2375 4924.5,2375 4964.5,2335 4964.5,2049.5 4940,2025 U4.12
  Bottom Layer w15: U5.5 3674,2920 3722,2968 3810.88,2968 4229.88,2549 5151,2549 5278,2422 5278,2240 5260,2222 5157,2222 4960,2025 U4.12
NetU3_6: U3.6 U4.11 | length 3246.3
  Top Layer w15: U3.6 4688,3580 4719.85,3611.85 4842.15,3611.85 4967,3487 v1(4967,2833)
  Bottom Layer w15: U4.11 5194,1925 5197,1922 5278,1922 5376,2020 5566,2020 5626,2080 5626,2800 5593,2833 v1(4967,2833)
NetU3_7: U3.7 U4.14 U5.4 | length 3659.9
  Top Layer w15: v1(4197,2686) 4401,2482 4401,2280 4423,2258 4514,2258 4531,2275 4687,2275 4737,2225 U4.14 ; U3.7 4738,3575 4749.85,3586.85 4817,3586.85 4879,3524.85 4879,2771 v1(4902,2748)
  Bottom Layer w15: U5.4 3701,3020 3748.5,3067.5 3815.5,3067.5 v1(4197,2686) 4231,2652 4806,2652 v1(4902,2748)
NetU4_2: U4.2 U5.3 | length 1678
  Top Layer w15: v1(4500,2699) 4500,2345 4520,2325 U4.2
  Bottom Layer w15: U5.3 3692.5,3120 3740,3167.5 3810,3167.5 4278.5,2699 v1(4500,2699)
NetU5_9: U5.9 U8.7 U9.14 | length 1877
  Top Layer w15: U8.7 3574,3412 3611,3375 3808,3375 3862.5,3320.5 3862.5,2839.5 3843,2820 U5.9 3731,2820 3721,2810 3721,2620 3548.5,2447.5 3548.5,2399.5 3573,2375 3640,2375 3663.5,2351.5 3663.5,2238.5 3650,2225 U9.14
NetU5_10: U5.10 U8.2 U9.12 | length 2290.4
  Top Layer w15: U8.2 3324,2950 v1(3404,2870) ; U9.12 3560,2025 3498.5,2086.5 3498.5,2514.86 3562.5,2578.86 3562.5,2894.5 3588,2920 U5.10
  Bottom Layer w15: v1(3404,2870) 3548,2870 3573,2895 3685,2895 3710,2920 U5.10
NetU5_11: U5.11 U9.2 | length 1118.2
  Top Layer w15: U9.2 3296,2325 3248.5,2372.5 3248.5,2488.5 3270,2510 3423.5,2510 3537.5,2624 3537.5,2920 3637.5,3020 U5.11
NetU5_12: U5.12 U5.13 U7.15 | length 1275.1
  Top Layer w15: U5.12 U5.13 ; v1(3955,3111) 4094,2972 4094,2391 4160,2325 U7.15
  Bottom Layer w15: U5.13 3846,3220 v1(3955,3111)
NetU6_1: U6.1 U7.13 | length 1666.8
  Top Layer w15: U6.1 3856,3394.5 3887.5,3363 3887.5,3043.5 4035,2896 4035,2170 4080,2125 U7.13
NetU6_2: U6.2 U7.12 | length 1834.1
  Top Layer w15: U6.2 3906,3386.5 3912.5,3380 3912.5,3080 4065,2927.5 4065,2180 4070,2175 4277,2175 4301.5,2150.5 4301.5,2056.5 4270,2025 U7.12
NetU6_6: U6.6 U7.11 | length 1815.2
  Top Layer w15: U6.6 4106,3024.5 4134.5,2996 4134.5,2442.5 4200,2377 4280,2377 4326.5,2330.5 4326.5,1951.5 4300,1925 U7.11
NetU6_7: U6.7 U7.14 | length 1605.3
  Top Layer w15: U6.7 4156,3009 4193.88,2971.12 4193.88,2855.12 4461,2588 v1(4461,2307)
  Bottom Layer w15: U7.14 4379,2225 v1(4461,2307)
NetU8_1: U8.1 U9.13 | length 1817.4
  Top Layer w15: v1(3171,2273) 3171,2727 3274,2830 U8.1
  Bottom Layer w15: v1(3171,2273) 3400,2273 3456,2217 3456,2189 3520,2125 U9.13
NetU8_6: U8.6 U9.11 | length 2111.4
  Top Layer w15: U8.6 3524,3426 3720,3230 3720,3090 3740,3070 3808,3070 3837.5,3040.5 3837.5,2899.5 3808,2870 3712,2870 3642,2800 3642,2576.36 3523.5,2457.86 3523.5,2225 3575.5,2173 3640,2173 3663.5,2149.5 3663.5,1938.5 3650,1925 U9.11
NetU10_11: U10.11 U12.9 U14.9 | length 2085.4
  Top Layer w15: U12.9 2975,1725 3080.5,1830.5 3080.5,2515.5 3033,2563 3033,2980 3058,3005 U10.11
  Bottom Layer w15: U14.9 2499,1725 2547,1773 2832,1773 2880,1725 U12.9
NetU10_12: U10.12 U13.1 U14.13 | length 3164
  Top Layer w15: v1(1971,3280) 2110,3419 v1(2110,3444) U13.1
  Bottom Layer w15: v1(1971,3280) 1971,3270.53 1955,3254.53 1955,2222.82 2002.82,2175 2130,2175 2180,2125 U14.13 ; v1(2110,3444) 2382,3172 2382,2980 2407,2955 2872,2955 3022,3105 U10.12
NetU11_2: U11.2 U12.12 | length 2063.2
  Top Layer w15: U11.2 2742,3270 2755,3257 2840,3257 2862.45,3234.55 2862.45,2660.45 2860,2658 2860,1920 2903,1877 3002.5,1877 3025.5,1900 3025.5,1977.5 2978,2025 U12.12
NetU11_6: U11.6 U12.11 | length 1712.7
  Top Layer w15: U11.6 2942,2687.05 2885.5,2630.55 2885.5,1930.5 2891,1925 U12.11
NetU12_15: U12.15 U14.7 U14.10 | length 1344.9
  Bottom Layer w15: U14.7 U14.10 2531,1825 2586,1880 2586,2221 2640,2275 2768,2275 2818,2325 U12.15
NetU13_2: U13.2 U14.12 | length 1609.7
  Top Layer w15: U13.2 2160,3417 2227,3350 2227,2078 2280,2025 U14.12
NetU13_6: U13.6 U14.11 | length 1812
  Top Layer w15: U14.11 2440,1925 2511,1996 2511,3332 2360,3483 U13.6
NetU13_7: U13.7 U14.14 | length 2586.5
  Top Layer w15: U14.14 2373,2225 2388,2210 2388,2000 2363,1975 2300,1975 2272,1947 2272,1800 2295,1777 2386,1777 2574,1965 2574,3308 2410,3472 U13.7
QA: U11.7 U12.14 U15.13 | length 2040.5
  Top Layer w15: U12.14 2935,2225 2910.5,2249.5 2910.5,2460 2992,2541.5 v1(2992,3370) U11.7
  Bottom Layer w15: U15.13 2525.68,3205 2733.18,3412.5 2949.5,3412.5 v1(2992,3370)
QAB: U10.13 U15.11 | length 745.8
  Bottom Layer w15: U15.11 2500,3005 2650,3155 2955,3155 3005,3205 U10.13
QB: U11.1 U12.13 U15.12 | length 3590
  Top Layer w15: U15.12 2384,3090 2384,2647 2450,2581 v1(2450,2103) ; v1(2692,3309) U11.1
  Bottom Layer w15: U15.12 2488,3105 v1(2692,3309) ; v1(2450,2103) 2450,1963 2360,1873 2000,1873 1972,1845 1972,1800 1995,1777 2412,1777 2434,1799 2546,1799 2620,1873 2771,1873 2818,1920 2818,2080 2863,2125 U12.13
VCC: C3.1 P1.A9 R1.2 R3.1 R4.1 R47.1 U1.3 U1.4 U1.16 U2.7 U2.9 U2.10 U2.16 U3.3 U3.4 U3.16 U4.7 U4.10 U4.16 U5.14 U6.3 U6.4 U6.16 U7.7 U7.9 U7.10 U7.16 U8.3 U8.4 U8.16 U9.7 U9.10 U9.16 U10.14 U11.3 U11.4 U11.16 U12.7 U12.10 U12.16 U13.3 U13.4 U13.16 U14.16 U15.14 U16.4 U16.8 | length 19437
  Top Layer w20: U13.16 2110,3695 2140,3665 2200,3665 2260,3605 U13.4 ; U13.3 U13.4 ; U14.16 2330,3193.03 U15.14 2315,3305 2260,3360 U13.4 ; v1(2671,3699) 2692,3720 U11.16 ; U11.3 U11.4 2842,3385 v1(2857,3370) ; U12.16 3013,2425 3028,2410 3028,2025 3053,2000 3053,1842 3036,1825 U12.10 2962.07,1819.07 2919.07,1819.07 2885,1785 2885,1703 3013,1575 R4.1 ; U10.14 3186,3305 3217,3336 3217,3560 3255.83,3598.83 3360,3598.83 3374,3584.83 U8.3 U8.4 ; U8.16 3274,3745 3288,3731 v1(3288,3699) ; U9.16 3650.78,2425 3691,2384.78 3691,1865 3651,1825 U9.10 3560,1825 3546,1811 3546,1699 3685,1560 R3.1 ; U6.16 3856,3725 ; v1(4006,3320) U6.4 U6.3 3956,3612 3856,3712 3856,3725 ; U7.16 4290,2425 4354,2361 4354,1889 4290,1825 U7.10 U7.9 4244,1511 P1.A9 ; U3.16 4438,3719 4396.76,3677.76 3903.24,3677.76 3856,3725 ; U3.3 U3.4 4588,3600 4636,3648 4960,3648 5020,3708 ; C3.1 4875,1526 4818,1583 4818,1761 U4.10 4930,1825 4992,1887 4992,2363 4930,2425 U4.16 ; U1.16 5020,3708 ; U16.4 5120,3398 U1.3 ; U1.4 U1.3 ; U16.8 5410,2822 5472,2760 5472,2370 5530,2370 5607.5,2292.5 5607.5,1847.5 5530,1770 U2.10 U2.9 ; 5020,3708 5020,3640 5070,3590 5101,3590 5120,3571 U1.3
  Bottom Layer w20: U14.16 2434,2425 2484,2475 2783,2475 2833,2425 U12.16 ; U15.14 2493,3305 ; R47.1 2651,1580 2656,1575 R4.1 ; U12.7 U12.10 U9.7 U9.10 U7.7 U7.10 U4.7 U4.10 4914,1825 4969,1770 U2.7 U2.10 ; v1(2671,3699) 2671,3483 2493,3305 ; v1(2857,3370) 2922,3305 U10.14 U10.14 ; v1(3288,3699) 3105,3516 3105,3400 ; v1(4006,3320) U5.14 3630,3320 3580,3270 3115,3270 U10.14 ; U16.4 5110,3360 5154,3404 5506,3404 5580,3330 R1.2 5465,2940 U16.8 ; 2493,3305 2502,3305 2642,3445 3060,3445 3105,3400 ; U10.14 3105,3400
pads on no net: DS1.1 DS1.6 DS1.7 DS2.7 DS3.7 DS4.7 DS5.1 DS5.6 DS5.7 DS6.7 P1.3 P1.4 U4.8 U4.15 U9.15 U10.1 U10.2 U10.3 U10.4 U10.5 U10.6 U10.8 U10.9 U10.10 U14.15 U15.8 U15.9 U15.10
copper on no net:
  other v2: 5610,1265 1895,1270 5615,4805 1900,4810

## Polygon pours and split planes (outlines as drawn)
GND on Top Layer "Top Layer-No net" (solid, pour order 2): 1800,4875 5685,4875 5705,4895 5705,1140 1865,1140 1800,1205 1825,1230 1825,4870 1815,4870
GND on Bottom Layer "Top Layer-No net" (solid, pour order 3): 1820,4907.19 1830,4897.19 5710,4897.19 5710,1252.19 5670,1212.19 1835,1212.19 1835,4922.19 1825,4932.19

## Silkscreen, mask and mechanical layers (free items; w line width, h text height)
Top Overlay:
  text "20212567詹卫明" at 1855.49,2242.03 h118.11 r270
Mechanical 1:
  the board outline again, w51.18
Mechanical 13:
  the board outline again, w7.87